# EAGLE board untitled (EAGLE 9.6.2)
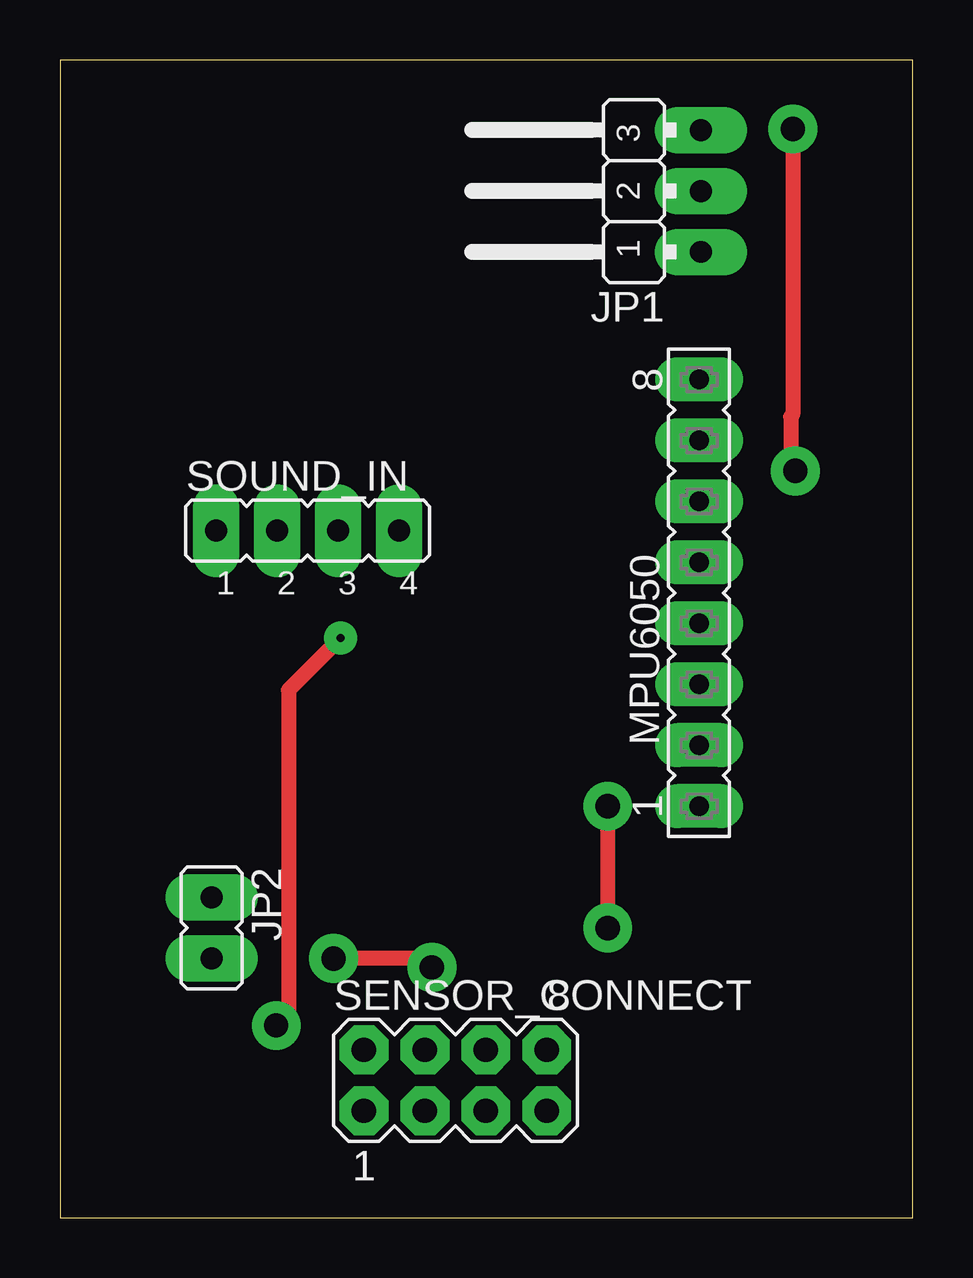
[diagram p0: board, top side]
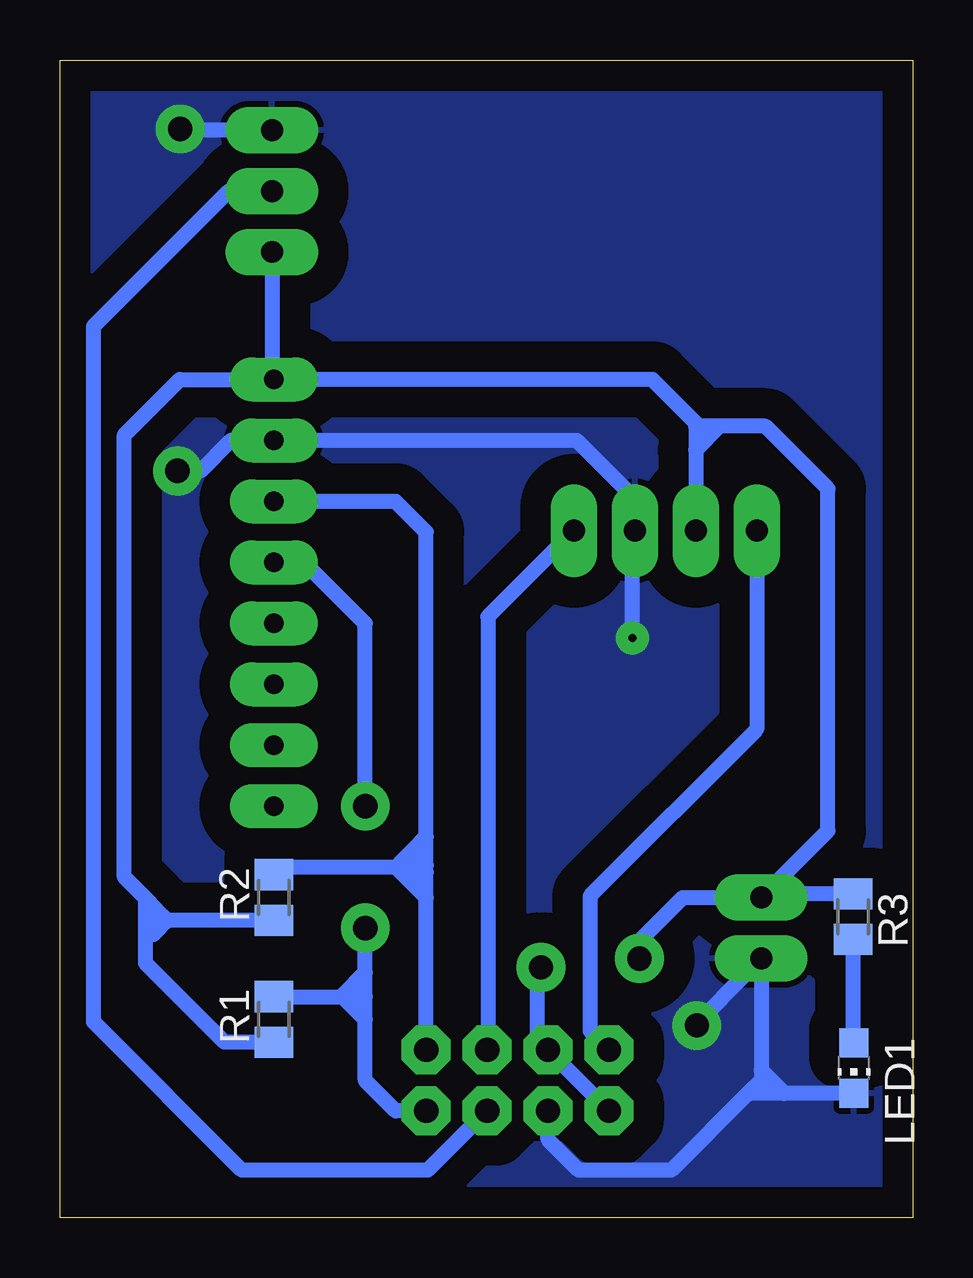
[diagram p1: board, bottom side, seen from below]

Size 35.56 x 48.26 mm. Coordinates in mm from the lower left corner, seen from the top.
Outline: 0,0 35.56,0 35.56,48.26 0,48.26 0,0
Copper layers (1*16): Top 0.035mm / dielectric 1.5mm / Bottom 0.035mm
Design rules "default *": minimum track width 6mil, minimum drill 0.35mm, track to track 6mil, track to pad 6mil, pad to pad 6mil, via to via 6mil, smd to smd 6mil, copper to edge 40mil, drill to drill 6mil, minimum pad ring 20mil, minimum via ring 20mil, stop-mask expansion 4mil, vias tented up to drill 0mil, thermal gap 10mil

## Footprints (pad centres in the part's own frame; a part is rotated, then mirrored left to right if it is on the bottom)
JP2W = drill 0.914 long: 1 -2.54,-1.27; 2 0,-1.27; 3 2.54,-1.27
JP1 = drill 0.914 long: 1 0,-1.27; 2 0,1.27
CHIP-LED0805 = smd 1.2 x 1.2: A 0,-1.05; C 0,1.05
FE08 = drill 0.813 long: 1 -8.89,0; 2 -6.35,0; 3 -3.81,0; 4 -1.27,0; 5 1.27,0; 6 3.81,0; 7 6.35,0; 8 8.89,0
M0805 = smd 1.3 x 1.6: 1 -0.95,0; 2 0.95,0
MA04-2 = drill 1.016 octagon: 1 -3.81,-1.27; 2 -3.81,1.27; 3 -1.27,-1.27; 4 -1.27,1.27; 5 1.27,-1.27; 6 1.27,1.27; 7 3.81,-1.27; 8 3.81,1.27
JP4 = drill 0.914 long: 1 -3.81,0; 2 -1.27,0; 3 1.27,0; 4 3.81,0

## Placement (x,y rotation side)
JP1  [JP2W]  25.45,42.8 90 top
JP2  [JP1]  6.32,12.08 180 top
LED1  [CHIP-LED0805]  2.46,6.24 180 bottom
MPU6050  [FE08]  26.64,26.05 90 top
R1  1k  [M0805]  26.64,8.27 90 bottom
R2  1k  [M0805]  26.64,13.35 90 bottom
R3  1k  [M0805]  2.5,12.55 270 bottom
SENSOR_CONNECT  [MA04-2]  16.48,5.73 0 top
SOUND_IN  [JP4]  10.33,28.64 0 top

## Library data of the parts
JP1 JP2 SOUND_IN = jumper
LED1 = led
MPU6050 = con-lsta; OC_FARNELL: unknown; OC_NEWARK: unknown
R1-R3 = adafruit
SENSOR_CONNECT = con-lstb; OC_FARNELL: unknown; OC_NEWARK: unknown

## Nets
5V: JP1.1 JP2.1 MPU6050.8 R1.1 R2.1 R3.1 SENSOR_CONNECT.1 SENSOR_CONNECT.4 SOUND_IN.2
GND: JP1.3 JP2.2 LED1.C MPU6050.7 SENSOR_CONNECT.3 SOUND_IN.3
N$1: LED1.A R3.2
SCL: MPU6050.6 R2.2 SENSOR_CONNECT.8
SDA: MPU6050.5 R1.2 SENSOR_CONNECT.7
SOUND_A0: SENSOR_CONNECT.6 SOUND_IN.4
SOUND_D0: SENSOR_CONNECT.2 SOUND_IN.1
TEMP_DATA: JP1.2 SENSOR_CONNECT.5

## Tracks (layer width: path | path; a pad name or v marks a point on that pad's centre or on a via)
5V  (via drill 1.02)
  Top 0.635: v15.51,10.44 15.14,10.81 v11.4,10.81
  Bottom 0.635: SENSOR_CONNECT.1 SENSOR_CONNECT.4 15.67,7.46 15.67,10.27 v15.51,10.44 | v11.4,10.81 11.4,11.54 9.6,13.35 JP2.1 | JP1.1 26.72,35.01 MPU6050.8 | JP2.1 3.54,16.13 3.54,30.39 6.15,32.99 8.06,32.99 | MPU6050.8 30.57,34.94 32.88,32.63 32.88,14.2 31.99,13.31 | R1.1 28.7,7.32 31.99,10.6 31.99,11.81 | R3.1 6.17,13.5 JP2.1 | MPU6050.8 10.86,34.94 9.05,33.13 9.05,32.99 | 9.05,32.99 9.05,32 | 9.05,32 SOUND_IN.2 | 8.06,32.99 9.05,32.99 | 8.06,32.99 9.05,32 | R2.1 31.08,12.4 | 31.99,13.31 31.57,12.88 | 31.57,12.88 31.08,12.4 | 31.99,11.81 31.99,13.31 | 31.08,12.4 31.4,12.07 | 31.4,12.07 31.67,11.81 31.99,11.81 | 31.57,12.88 31.57,12.24 31.4,12.07
GND  (via drill 0.35, 1, 1.02)
  Top 0.635: v30.55,45.38 30.55,33.47 30.47,33.39 30.47,31.13 v30.66,31.13 | v9.02,8.01 9.53,8.52 9.53,22 v11.7,24.17
  Bottom 0.635: 6.33,6.15 JP2.2 7.98,9.16 7.95,9.16 9.02,8.09 v9.02,8.01 | 6.33,6.15 6.33,5.73 6.83,5.22 | SENSOR_CONNECT.3 15.21,3.25 13.95,1.98 10.07,1.98 6.83,5.22 | JP1.3 28.3,45.34 | v11.7,24.17 11.72,24.19 11.72,28.51 SOUND_IN.3 11.6,29.98 14.01,32.4 MPU6050.7 28.43,32.4 29.7,31.13 v30.66,31.13 | LED1.C 5.36,5.19 | 5.36,5.19 6.33,6.15 | 5.36,5.19 6.8,5.19 6.83,5.22 | 26.73,45.33 JP1.3 | JP1.3 30.57,45.34 30.58,45.35 v30.55,45.38
  pour Bottom (isolate 1.27): 0.04,48.22 0.04,-0.01 0.03,-0.03 35.56,-0.03 35.57,-0.01 35.57,48.26 0.05,48.26 0.05,48.23
N$1
  Bottom 0.635: R3.2 2.5,7.32 LED1.A
SCL
  Bottom 0.635: SENSOR_CONNECT.8 20.3,13.35 | 20.3,13.35 21.06,14.12 | 21.06,14.12 21.57,14.62 | R2.2 26.32,14.62 21.57,14.62 | 21.37,14.81 20.89,15.29 | 20.89,15.29 20.3,15.89 | 20.3,15.89 20.3,28.59 21.57,29.86 MPU6050.6 | 20.3,13.35 20.3,14.4 | 20.3,14.4 20.3,14.69 | 20.3,14.69 20.3,15.89 | 20.58,14.98 20.41,14.81 | 20.41,14.81 20.3,14.69 | 21.57,14.62 21.37,14.81 | 21.37,14.81 20.41,14.81 | 20.3,14.4 20.58,14.12 | 20.58,14.12 21.06,14.12 | 20.89,15.29 20.58,14.98 | 20.58,14.98 20.58,14.57 | 20.58,14.57 20.58,14.12 | 21.57,14.62 20.63,14.62 20.58,14.57
SDA  (via drill 1.02)
  Top 0.635: v22.84,12.08 v22.84,17.16
  Bottom 0.635: SENSOR_CONNECT.7 21.57,4.46 22.84,5.73 22.84,8.27 | R1.2 23.79,9.22 | 22.84,9.22 23.79,9.22 | 22.84,9.22 22.84,10.22 | 22.84,10.22 v22.84,12.08 | v22.84,17.16 22.84,24.78 25.38,27.32 MPU6050.5 | 22.84,8.27 22.84,9.22 | 22.84,8.27 23.79,9.22 | 23.79,9.22 23.79,9.27 22.84,10.22
SOUND_A0
  Bottom 0.635: SOUND_IN.4 17.72,25.06 17.72,7.04 SENSOR_CONNECT.6
SOUND_D0
  Bottom 0.635: SENSOR_CONNECT.2 13.46,7.79 13.46,13.41 6.51,20.36 SOUND_IN.1
TEMP_DATA
  Bottom 0.635: SENSOR_CONNECT.5 20.23,1.98 27.98,1.98 34.16,8.17 34.16,37.16 28.52,42.8 JP1.2